# Altium PCB STEVAL-ESLST25CB.PcbDoc
Units mm, origin at the board's own origin, x right, y up, seen from the top; angles counter-clockwise.
Board outline 37.28 x 31.82 mm, 2 copper layers (Top Layer, Bottom Layer), stack 1.67 mm thick; 7 components, 7 nets, 27 pads, 2 vias.
Unrouted connection lines stored in the file: 13.
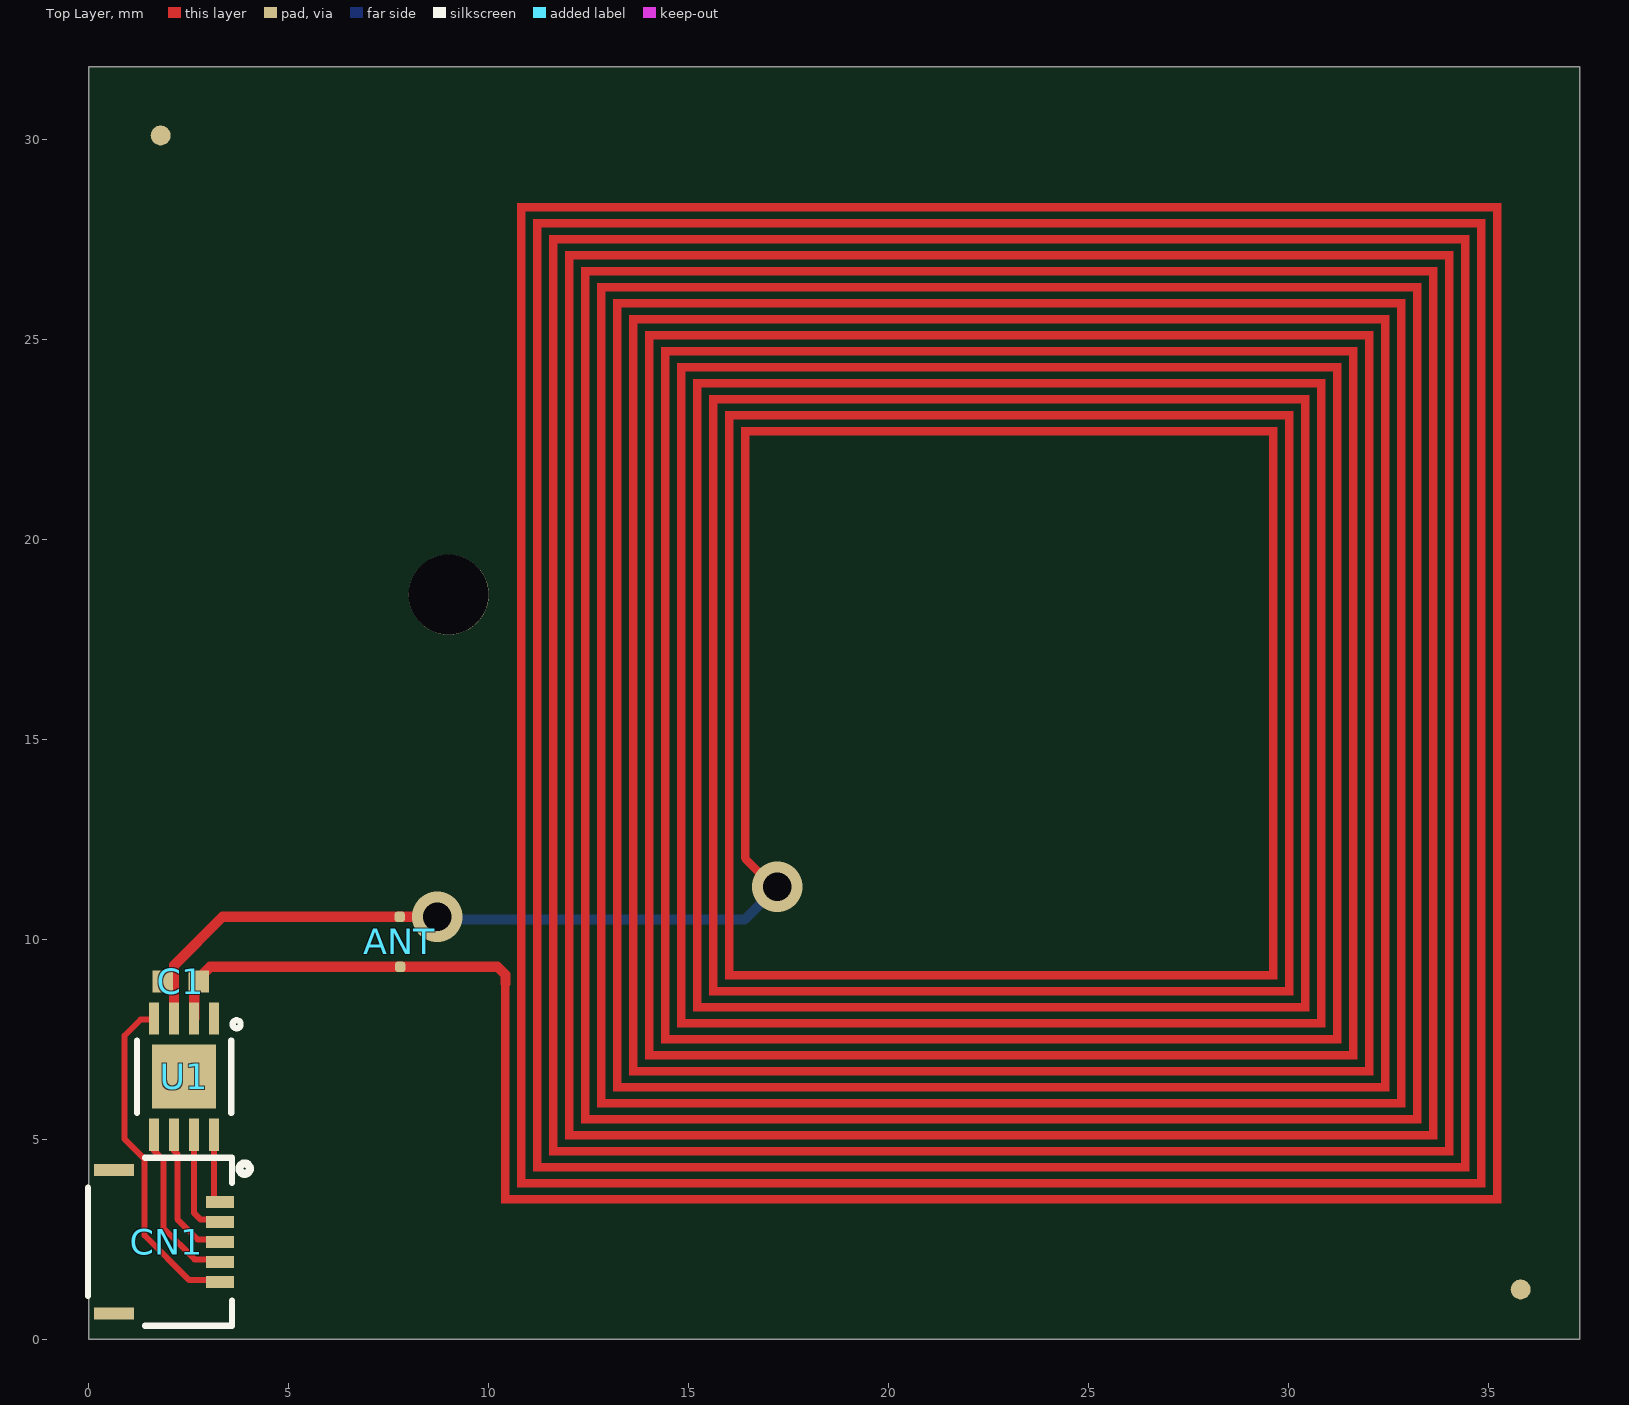
[diagram p0: Top Layer view]
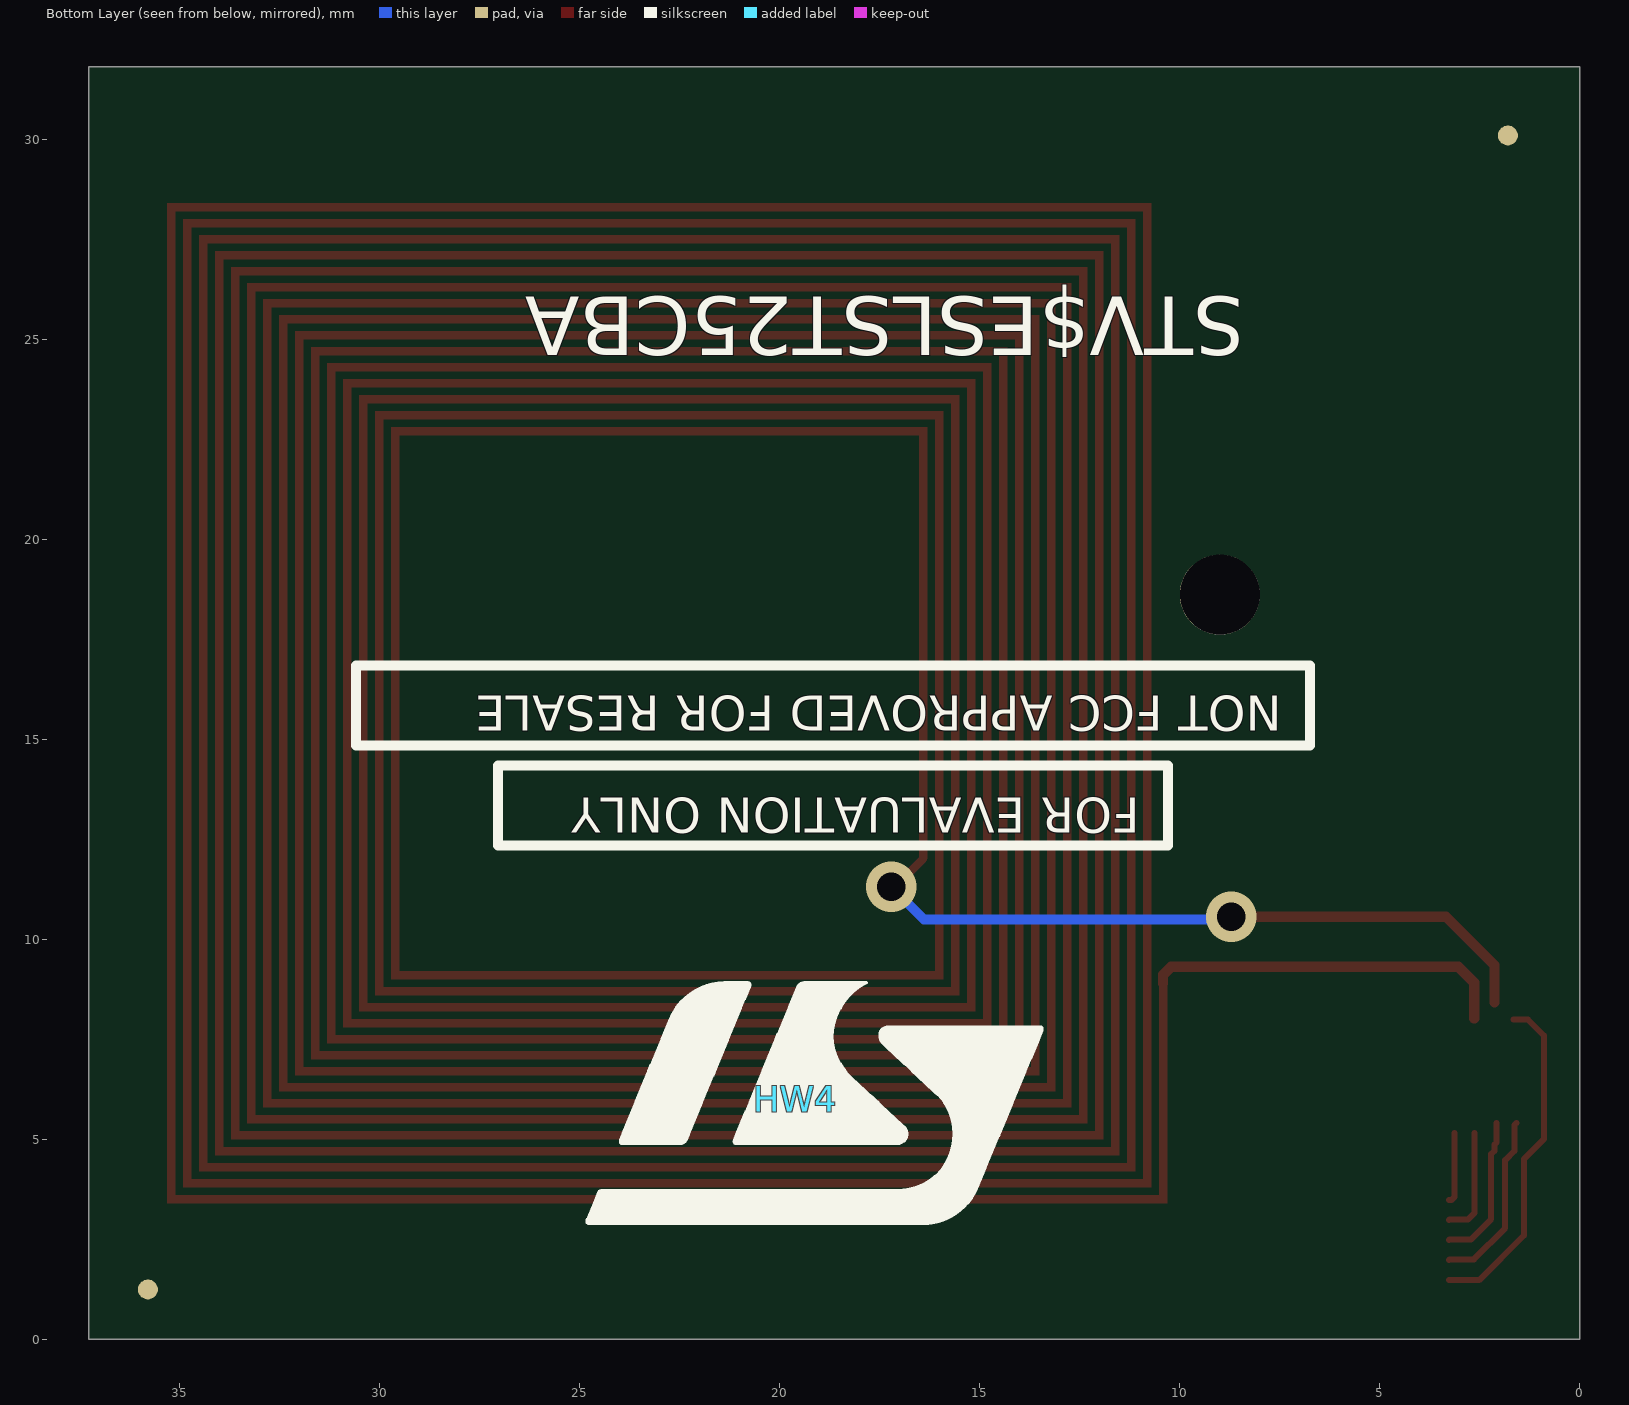
[diagram p1: Bottom Layer view, seen from below]

## Layer stack, top to bottom
Top Solder: solder mask 0.0102, Solder Resist, Dk 3.5
Top Layer: signal copper 0.035
Dielectric 1: dielectric 1.6, FR-4, Dk 4.5
Bottom Layer: signal copper 0.035
Bottom Solder: solder mask 0.0102, Solder Resist, Dk 3.5

## Board outline
0,0 37.28,0 37.28,31.82 0,31.82

## Design rules (kind name [scope] priority, off if disabled: settings)
Clearance [All] p1: gap=0.15 ignorepadtopadclearanceinfootprint=FALSE
PolygonConnect [All] p1: connectstyle=Relief reliefconductorwidth=0.254 reliefentries=4 polygonreliefangle="90 Angle" airgapwidth=0.254
RoutingVias [All] p1: holewidth=0.711 width=1.27 viastyle="Through Hole" minholewidth=0.711 minwidth=1.27 maxholewidth=0.711 maxwidth=1.27
SolderMaskExpansion [All] p1: expansion=0.102 istentingtop=FALSE
Width [All] p1: maxlimit=0.3 minlimit=0.15 preferedwidth=0.15
30 further rules are at their usual default settings.

## Classes and differential pairs
component class ST25D: ANT C1 CN1 U1

## Components (designator, comment, footprint, x,y, rotation, side; value= is the part's Value field where it differs from the comment)
ANT "ST25D_ANT" ESL_NFC_ANT 7.776,10.567 r0 top locked
C1 "Capacitor" C0402 2.3,8.95 r0 top
CN1 "5034800540" CON_5034800540_MOL 1.778,2.443 r270 top
Designator3 "Comment" Sheetbox_4L2S 47.983,-7.252 r0 top
Designator152 "Comment" PCB_SPECIFICATIONS 0.15,57.55 r0 top
HW4 "Logo" LOGO_ST 19.6,6 r0 bottom
U1 "ST25DV04K-IER6C3" UFDFPN8_STM 2.387,6.57 r270 top

## Footprints (in the part's own frame and the unit in brackets; to place one, negate y for a bottom-side part, rotate by r counter-clockwise, add the part's x,y. Pads: shape width x height; smd on the part's side, far side on the other; paste and mask are expansions set on the pad)
C0402 [mm]
  rect 0.51x0.56 smd mask+0.05: 1(-0.45,0) 2(0.45,0)
  body extent -0.5,-0.3 0.5,0.3, height 0.4
CON_5034800540_MOL [mm]
  rect 0.3x0.7 smd paste+0 mask+0.076: 1(-1,1.5) 2(-0.5,1.5) 3(0,1.5) 4(0.5,1.5) 5(1,1.5)
  rect 0.3x1 smd paste+0 mask+0.076: P1(-1.79,-1.15) P2(1.79,-1.15)
  silkscreen extent -2.1,-1.8 2.1,2.25, body extent -2.1,-1.82 2.1,1.78, height 1.87
ESL_NFC_ANT [mil]
  rrect50% 10x10 smd mask+4: 1(0,0) 2(0.51,-49.21)
  Top Layer region: 1084.43,-282.16 100.18,-282.16 100.17,-66.29 100.27,-66.36 104.11,-67.12 107.95,-66.36 108.05,-66.29 108.05,-274.28 1076.55,-274.28 1076.55,694.22 123.8,694.22 123.8,-258.54 1060.81,-258.54 1060.81,678.47 139.55,678.47 139.55,-242.79 1045.06,-242.79 1045.06,662.72 155.29,662.72 155.29,-227.04 1029.31,-227.04 1029.31,646.98 171.04,646.98 171.04,-211.29 1013.56,-211.29 1013.56,631.23 186.79,631.23 186.79,-195.54 997.81,-195.54 997.81,615.48 202.54,615.48 202.54,-179.8 982.07,-179.8 982.07,599.73 218.29,599.73 218.29,-164.05 966.32,-164.05 966.32,583.98 234.03,583.98 234.03,-148.3 950.57,-148.3 950.57,568.24 249.78,568.24 249.78,-132.55 934.82,-132.55 934.82,552.49 265.53,552.49 265.53,-116.8 919.07,-116.8 919.07,536.74 281.28,536.74 281.28,-101.06 903.33,-101.06 903.33,520.99 297.03,520.99 297.03,-85.31 887.58,-85.31 887.58,505.24 312.77,505.24 312.77,-69.56 871.83,-69.56 871.83,489.5 328.52,489.5 328.52,-53.81 856.08,-53.81 856.08,473.75 344.27,473.75 344.27,57 336.4,57 336.4,481.62 863.96,481.62 863.96,-61.69 320.65,-61.69 320.65,497.37 879.7,497.37 879.7,-77.43 304.9,-77.43 304.9,513.12 895.45,513.12 895.45,-93.18 289.15,-93.18 289.15,528.87 911.2,528.87 911.2,-108.93 273.4,-108.93 273.4,544.61 926.95,544.61 926.95,-124.68 257.66,-124.68 257.66,560.36 942.7,560.36 942.7,-140.43 241.91,-140.43 241.91,576.11 958.44,576.11 958.44,-156.17 226.16,-156.17 226.16,591.86 974.19,591.86 974.19,-171.92 210.41,-171.92 210.41,607.61 989.94,607.61 989.94,-187.67 194.66,-187.67 194.66,623.35 1005.69,623.35 1005.69,-203.42 178.92,-203.42 178.92,639.1 1021.44,639.1 1021.44,-219.17 163.17,-219.17 163.17,654.85 1037.18,654.85 1037.18,-234.91 147.42,-234.91 147.42,670.6 1052.93,670.6 1052.93,-250.66 131.67,-250.66 131.67,686.35 1068.68,686.35 1068.68,-266.41 115.92,-266.41 115.92,702.09 1084.43,702.09
  Top Layer lines w7.87: 340.33,57 367.8,29.53
  Top Layer lines w10: 0,0 36.99,0 ; 0.51,-49.21 96.23,-49.21 104.11,-57.09 104.11,-65.43
  Bottom Layer lines w10: 39.62,-2.63 339.48,-2.63 371.64,29.53
LOGO_ST [mm]
  silkscreen extent -6.18,-2.95 5.25,3.14
PCB_SPECIFICATIONS [mm]
Sheetbox_4L2S [mil] "Sheetbox 4 layers / 2 silkscreens"
  round 20 on Mech16: 1(813.78,210.69) 1(2736.9,210.69)
UFDFPN8_STM [mil]
  rect 31.7x9.8 smd paste+0 mask+0: 1(-57.15,29.55) 2(-57.15,9.85) 3(-57.15,-9.85) 4(-57.15,-29.55) 5(57.15,-29.55) 6(57.15,-9.85) 7(57.15,9.85) 8(57.15,29.55)
  rect 63x63 smd paste+0 mask+0: 9(0,0)
  silkscreen extent -56,-46 36,56, body extent -61,-41 61,41, height 24

## Part data
C1: library part MCD-00003, "Multilayer Ceramic Capacitor, 1.5 pF, 50 V, ± 0.1pF, C0G (NP0), 0402 [1005 Metric]", Manufacturer=Murata, Manufacturer Part Number=GJM1555C1H1R5BB01D, Supplier Part Number 1=490-8087-1-ND, Category="Ceramic Capacitors", ComponentLink1URL=http://tunmcdsvn.tun.st.com/Component_Documentation_Library/Trunk/Capacitor/YAGEO_NP0_Series, ComponentLink2Description=https://datasheet.ciiva.com/8030/1700191-8030107.pdf?src-supplier=Element14, ComponentLink2URL=https://datasheet.ciiva.com/8030/1700191-8030107.pdf?src-supplier=Element14, ComponentLink3Description=https://datasheet.ciiva.com/29542/partnumbering-e-01-29542725.pdf?src-supplier=Digikey, ComponentLink3URL=https://datasheet.ciiva.com/29542/partnumbering-e-01-29542725.pdf?src-supplier=Digikey, ComponentLink4Description=https://datasheet.ciiva.com/29542/partnumbering-e-01-29542726.pdf?src-supplier=Digikey, ComponentLink4URL=https://datasheet.ciiva.com/29542/partnumbering-e-01-29542726.pdf?src-supplier=Digikey, Material=4241ConductorMaterial, Pricing 1="1=0.17, 10=0.112, 50=0.067, 100=0.0527, 500=0.03896, 1000=0.03225, 2500=0.03002, 5000=0.02746 (USD)", RoHS=Yes, Stock 1=133157, Supplier 1=Digikey
CN1: library part 5034800540_5_circuits, "No Description Available", Mfr_Name="Molex Connector Corporation", Copyright="Copyright (C) 2023 Ultra Librarian. All rights reserved.", Manufacturer_Part_Number=5034800540, RefDes=RefDes, Type=DEV
Designator3: library part MCD-00279
HW4: library part MCD-00625, "\"STMicroelectronics\" logo footprint for PCB"
U1: "No Description Available", Mfr_Name=STMicroelectronics, Copyright="Copyright (C) 2023 Ultra Librarian. All rights reserved.", Manufacturer_Part_Number=ST25DV04K-IER6C3, RefDes=RefDes, Type=DEV

## Free pads (board coordinates)
  round 0.5 smd mask+0: 1(1.8,30.1) 1(35.8,1.25)
  round 0.5 smd far side mask+0: 1(1.8,30.1) 1(35.8,1.25)
  round 2 hole 2: 13(9,18.62)

## Via types
v1: diameter 1.27/1.27 (per signal layer), hole 0.711, Top Layer to Bottom Layer, 2 vias

## Nets (pads, with @x,y where several pads share a name; then routed paths per layer and width w, separated by ;. In a path a pad name is that pad's centre, name@x,y a point inside that pad or via, vN(x,y) a via of type N, cw(c..) or ccw(c..) an arc to the next point about the centre after c; other vN are vias at no path point)
AC0: ANT.2 C1.2 U1.2 | length 9.1
  Top Layer w0.254: U1.2 2.639,8.024 2.639,8.917 3.039,9.317 10.22,9.317 10.42,9.117 10.42,8.905
AC1: ANT.1 C1.1 U1.3 | length 10.3
  Top Layer w0.2: 16.42,12.015 17.118,11.317 v1(17.215,11.317)
  Top Layer w0.254: 2.137,8.424 2.137,9.357 3.347,10.567 v1(8.715,10.567)
  Bottom Layer w0.2: v1(8.715,10.567) v1@8.782,10.5
  Bottom Layer w0.254: 16.398,10.5 v1(17.215,11.317)
GND: CN1.5 U1.4 | length 8.5
  Top Layer w0.15: U1.4@1.657,8.001 1.301,8.001 0.9,7.6 0.9,5.009 1.4,4.509 1.4,2.6 2.517,1.483 CN1.5@3.278,1.483
GPO: CN1.2 U1.7 | length 2.7
  Top Layer w0.15: U1.7@2.637,5.168 2.637,3.159 2.792,3.004 3.257,3.004 CN1.2@3.278,2.983
SCL: CN1.3 U1.6 | length 3.7
  Top Layer w0.15: U1.6@2.087,5.414 2.087,4.922 2.136,4.873 2.136,4.716 2.216,4.636 2.216,3.008 2.72,2.504 3.257,2.504 CN1.3@3.278,2.483
SDA: CN1.4 U1.5 | length 4.5
  Top Layer w0.15: U1.5@1.589,5.412 1.636,5.365 1.636,4.716 1.87,4.482 1.87,2.783 2.649,2.004 3.257,2.004 CN1.4@3.278,1.983
VDD: CN1.1 U1.8 | length 1.8
  Top Layer w0.15: U1.8@3.137,5.168 3.137,3.558 3.212,3.483 CN1.1@3.278,3.483
pads on no net: CN1.P1 CN1.P2 Designator3.1 U1.1 U1.9

## Silkscreen, mask and mechanical layers (free items; w line width, h text height)
Bottom Overlay:
  lines w0.254: 6.75,14.853 30.6,14.853 30.6,16.853 6.75,16.853 6.75,14.853 ; 10.3,12.35 27.05,12.35 27.05,14.35 10.3,14.35 10.3,12.35
  text "STV$ESLST25CBA" at 8.39,26.55 h2.5 r180
  text "NOT FCC APPROVED FOR RESALE" at 7.45,16.383 h1.5 r180
  text "FOR EVALUATION ONLY" at 11,13.833 h1.5 r180
Mechanical 1:
  the board outline again, w0.254
Drill Drawing:
  circle w0.254: c2.212,48.542 r0.701
  lines w0.254: 1.511,50.995 2.913,50.995 2.913,52.397 1.511,52.397 1.511,50.995
  lines w0.381: 0.241,46.895 97.908,46.895 ; 0.241,53.203 97.908,53.203 ; 8.347,43.741 8.347,56.357 ; 14.509,43.741 14.509,56.357 ; 28.441,43.741 28.441,56.357 ; 34.726,43.741 34.726,56.357 ; 43.878,43.741 43.878,56.357 ; 50.881,20.709 57.259,20.709 69.593,20.709 80.676,20.709 89.78,20.709 98.206,20.709 ; 50.881,23.757 57.259,23.757 69.593,23.757 80.676,23.757 89.78,23.757 98.206,23.757 ; 50.881,26.805 57.259,26.805 69.593,26.805 80.676,26.805 89.78,26.805 98.206,26.805 ; 50.881,29.853 57.259,29.853 69.593,29.853 80.676,29.853 89.78,29.853 98.206,29.853 ; 50.881,32.901 57.259,32.901 69.593,32.901 80.676,32.901 89.78,32.901 98.206,32.901 ; 50.881,35.949 57.259,35.949 69.593,35.949 80.676,35.949 89.78,35.949 98.206,35.949 ; 50.881,38.997 98.206,38.997 ; 57.259,42.045 57.259,17.661 ; 61.221,43.741 61.221,56.357 ; 68.719,43.741 68.719,56.357 ; 69.593,42.045 69.593,17.661 ; 78.515,43.741 78.515,56.357 ; 80.676,42.045 80.676,17.661 ; 87.123,43.741 87.123,56.357 ; 89.78,42.045 89.78,17.661 ; 57.259,17.661 69.593,17.661 ; 57.259,17.661 50.881,17.661 50.881,42.045 98.206,42.045 98.206,17.661 89.78,17.661 ; 69.593,17.661 80.676,17.661 ; 80.676,17.661 89.78,17.661 ; 0.241,43.741 97.908,43.741 97.908,56.357 0.241,56.357 0.241,43.741
  text "X" at 39.65,68.05 h3
  text "Symbol" at 2.133,54.149 h1.83
  text "Count" at 9.293,54.149 h1.83
  text "Hole Size" at 15.456,54.149 h1.83
  text "Plated" at 29.387,54.149 h1.83
  text "Hole Type" at 35.673,54.149 h1.83
  text "Drill Layer Pair" at 44.824,54.149 h1.83
  text "Via/Pad" at 62.167,54.149 h1.83
  text "Pad Shape" at 69.665,54.149 h1.83
  text "Template" at 79.461,54.149 h1.83
  text "Description" at 88.07,54.149 h1.83
  text "2" at 9.293,50.995 h1.52
  text "0.711mm (28.00mil)" at 15.456,50.995 h1.52
  text "PTH" at 29.387,50.995 h1.52
  text "Round" at 35.673,50.995 h1.52
  text "Top Layer - Bottom Layer" at 44.824,50.995 h1.52
  text "Via" at 62.167,50.995 h1.52
  text "Rounded" at 69.665,50.995 h1.52
  text "v127h71z0" at 79.461,50.995 h1.52
  text "1" at 9.293,47.841 h1.52
  text "2.000mm (78.74mil)" at 15.456,47.841 h1.52
  text "PTH" at 29.387,47.841 h1.52
  text "Round" at 35.673,47.841 h1.52
  text "Top Layer - Bottom Layer" at 44.824,47.841 h1.52
  text "Pad" at 62.167,47.841 h1.52
  text "Rounded" at 69.665,47.841 h1.52
  text "c200h200" at 79.461,47.841 h1.52
  text "3 Total" at 9.293,44.687 h1.52
  text "Layer" at 52.405,39.759 h1.52
  text "Name" at 58.783,39.759 h1.52
  text "Material" at 71.117,39.759 h1.52
  text "Thickness" at 82.2,39.759 h1.52
  text "Constant" at 91.304,39.759 h1.52
  text "Top Overlay" at 58.783,36.711 h1.52
  text "Top Solder" at 58.783,33.663 h1.52
  text "Solder Resist" at 71.117,33.663 h1.52
  text "0.010mm" at 82.2,33.663 h1.52
  text "3.5" at 91.304,33.663 h1.52
  text "1" at 52.405,30.615 h1.52
  text "Top Layer" at 58.783,30.615 h1.52
  text "0.035mm" at 82.2,30.615 h1.52
  text "Dielectric 1" at 58.783,27.567 h1.52
  text "FR-4" at 71.117,27.567 h1.52
  text "1.600mm" at 82.2,27.567 h1.52
  text "4.5" at 91.304,27.567 h1.52
  text "2" at 52.404,24.519 h1.52
  text "Bottom Layer" at 58.783,24.519 h1.52
  text "0.035mm" at 82.2,24.519 h1.52
  text "Bottom Solder" at 58.783,21.471 h1.52
  text "Solder Resist" at 71.117,21.471 h1.52
  text "0.010mm" at 82.2,21.471 h1.52
  text "3.5" at 91.304,21.471 h1.52
  text "Bottom Overlay" at 58.783,18.423 h1.52
  text "Total board thickness:" at 52.405,15.375 h1.52
  text "1.690mm" at 82.2,15.375 h1.52

## Dimensions
0,31.82 to 37.28,31.82 on Mechanical 2
0,31.82 to 0,0 on Mechanical 2

## Text inside footprints (layer, text, board x,y; h text height)
Designator3: Mechanical 20 "Variant: '.VariantName'" at 48.983,-0.552 h3; Mechanical 20 "Gerber:" at 88.972,4.448 h3; Mechanical 20 "Layer:" at 48.983,4.448 h3; Mechanical 20 "R" at 134.479,-3.034 h1.52; Mechanical 20 "Date: '.Board_Document_Date'" at 48.983,-5.552 h3; Mechanical 20 "Ref: '.Board_Reference'" at 89.099,-0.552 h3; Mechanical 20 "Rev: '.Board_PCB_Revision'" at 89.042,-5.552 h3; Mechanical 20 "Project: '.Board_Name'" at 48.983,9.532 h3; Mechanical 21 "Project: '.Board_Name'" at 136.789,9.532 h3; Mechanical 21 "Rev: '.Board_PCB_Revision'" at 96.857,-5.552 h3; Mechanical 21 "Ref: '.Board_Reference'" at 96.8,-0.552 h3; Mechanical 21 "Date: '.Board_Document_Date'" at 136.789,-5.552 h3; Mechanical 21 "R" at 51.674,-3.034 h1.52; Mechanical 21 "Layer:" at 136.788,4.448 h3; Mechanical 21 "Gerber:" at 96.8,4.448 h3; Mechanical 21 "Variant: '.VariantName'" at 136.789,-0.552 h3
Designator152: Drill Drawing "X  TG-170" at 56.15,86.05 h3; Drill Drawing "TG-150" at 74.4,86.05 h3; Drill Drawing "TG-140" at 90.4,86.05 h3; Drill Drawing "GOLDEN FINGER" at 90.4,71.05 h3; Drill Drawing "IMMERSION TIN" at 90.4,74.05 h3; Drill Drawing "BLACK" at 90.4,80.05 h3; Drill Drawing "BLACK" at 74.4,77.05 h3; Drill Drawing "RED" at 74.4,80.05 h3; Drill Drawing "BLUE" at 56.15,80.05 h3; Drill Drawing "YELLOW" at 56.15,77.05 h3; Drill Drawing "IMMERSION SILVER" at 56.15,74.05 h3; Drill Drawing "HASL (PB-FREE)" at 56.15,71.05 h3; Drill Drawing "YES  (SEE IMPEDANCE TABLE FOR DETAIL INFORMATION)" at 56.15,68.05 h3; Drill Drawing "NON-CONDUCTIVE EPOXY." at 90.4,62.05 h3; Drill Drawing "X  SOLDERMASK" at 65.15,62.05 h3; Drill Drawing "H.   STACK-UP :" at 1.15,59.05 h3; Drill Drawing "SEE LAYER STACK-UP SEQUENCE FOR OVERALL THICKNESS." at 39.65,59.05 h3; Drill Drawing "F.   IMPEDANCE CONTROL :" at 1.15,68.05 h3; Drill Drawing "G.   THROUGH VIA :" at 1.15,65.05 h3; Drill Drawing "PLUG MATERIAL :" at 39.65,62.05 h3; Drill Drawing "PLUG THE VIAS WHICH ARE COVERED WITH SOLDERMASK ONE OR TWO SIDE." at 39.65,65.05 h3; Drill Drawing "NO" at 39.65,68.05 h3; Drill Drawing "HASL" at 39.65,71.05 h3; Drill Drawing "X  ENIG" at 39.65,74.05 h3; Drill Drawing "X  WHITE" at 39.65,77.05 h3; Drill Drawing "FR-4" at 39.65,86.05 h3; Drill Drawing "N/A" at 39.65,83.05 h3; Drill Drawing "X  GREEN" at 39.65,80.05 h3; Drill Drawing "E.   SURFACE FINISH :" at 1.15,74.05 h3; Drill Drawing "D.   SILKSCREEN COLOR :" at 1.15,77.05 h3; Drill Drawing "C.   SOLDERMASK COLOR :" at 1.15,80.05 h3; Drill Drawing "B.   MATERIAL FAMILY :" at 1.15,83.05 h3; Drill Drawing "A.   MATERIAL :" at 1.15,86.05 h3; Drill Drawing "PCB SPECIFICATIONS :" at 1.15,90.05 h3